# EAGLE board Bio_v4_LCD1_1button (EAGLE 6.5.0)
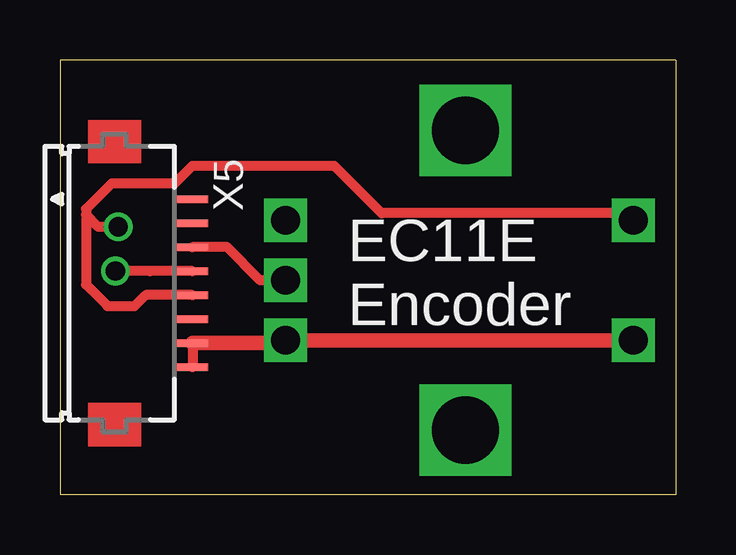
[diagram p0: board, top side]
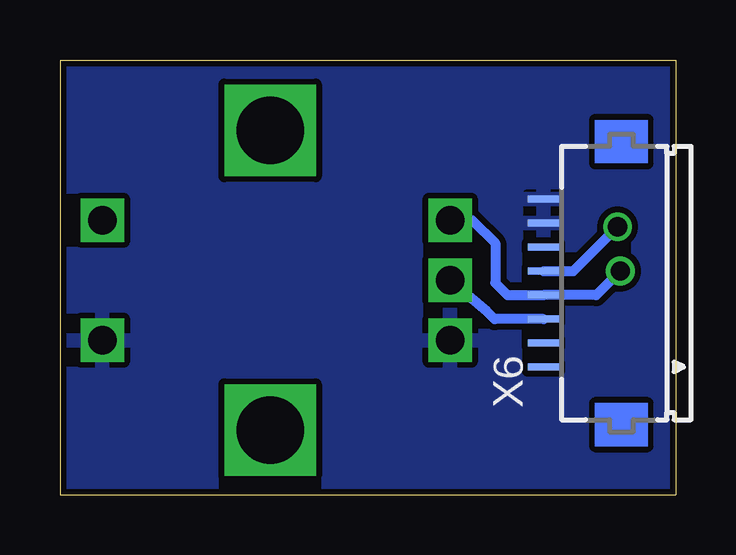
[diagram p1: board, bottom side, seen from below]

Size 25.67 x 18.14 mm. Coordinates in mm from the lower left corner, seen from the top.
Outline: 25.67,0 0,0 0,18.14 25.67,18.14 25.67,0
Copper layers (1*2*15*16): Top 0.035mm / dielectric 0.2mm / layer 2 0.0175mm / dielectric 1.1mm / layer 15 0.0175mm / dielectric 0.2mm / Bottom 0.035mm
Design rules "SeeedStudio_DRU_no_angle_20130527": minimum track width 6mil, minimum drill 12mil, track to track 6mil, track to pad 6mil, pad to pad 6mil, via to via 6mil, smd to smd 0mil, copper to edge 10mil, drill to drill 10mil, minimum pad ring 6mil, minimum via ring 6mil, stop-mask expansion 2mil, vias tented up to drill 25mil, thermal gap 10mil
Net classes: 0 default: width 0.203 mm, clearance 0.25 mm; 1 power: width 0.203 mm, drill 0.305 mm, clearance 0.25 mm; 2 VIN: width 0.457 mm, clearance 0.25 mm; 3 fine: width 0.254 mm, clearance 0.25 mm; 4 aref: width 0.356 mm, clearance 0.25 mm

## Footprints (pad centres in the part's own frame; a part is rotated, then mirrored left to right if it is on the bottom)
EC11E = drill 1.2 square: A -2.5,0; B 0,0; C 2.5,0; D -2.5,14.5; E 2.5,14.5 | drill 2.8 square: P$1 6.25,7.5; P$2 -6.25,7.5
FH12-08S-1SH = smd 0.3 x 1.3: 1 -3.5,3.25; 2 -2.5,3.25; 3 -1.5,3.25; 4 -0.5,3.25; 5 0.5,3.25; 6 1.5,3.25; 7 2.5,3.25; 8 3.5,3.25

## Placement (x,y rotation side)
U$1  EC11E  [EC11E]  9.41,8.95 270 top
X5  FH12-08S-1SH  [FH12-08S-1SH]  2.28,8.83 270 top
X6  FH12-08S-1SH  [FH12-08S-1SH]  2.27,8.84 90 bottom

## Library data of the parts
U$1 = lpatiny
X5 X6 = con-hirose; OC_FARNELL: unknown; OC_NEWARK: unknown

## Nets
D7*: U$1.D X5.5 X6.5
GND [power]: U$1.C U$1.E X5.7 X5.8 X6.7 X6.8
RX: U$1.B X5.3 X6.3
TX: U$1.A X5.4 X6.4

## Tracks (layer width: path | path; a pad name or v marks a point on that pad's centre or on a via)
D7*  (via drill 0.8)
  Top 0.406: U$1.D 23.61,11.75 13.41,11.75 11.44,13.72 5.52,13.72 4.79,13 2.16,13 1.09,11.93 1.09,11.69 | 1.09,11.69 1.09,8.77 1.99,7.87 3.11,7.87 3.57,8.33 X5.5 | v2.43,11.18 1.6,11.18 1.09,11.69
  Bottom 0.406: X6.5 4.27,9.34 v2.43,11.18
GND
  Top 0.406: X5.7 X5.8
  Top 0.61: X5.7 9.29,6.33 U$1.C U$1.E
  pour Bottom: 0.02,18.13 25.67,18.13 25.67,-0.45 -0.15,-0.45 -0.15,17.88
RX
  Top 0.406: U$1.B 8.35,8.95 6.97,10.33 X5.3
  Bottom 0.406: X6.3 7.55,7.34 7.87,7.66 U$1.B
TX  (via drill 0.8)
  Top 0.406: X5.4 3.75,9.33 3.75,9.34 v2.31,9.34
  Bottom 0.406: U$1.A 8.48,11.45 7.53,10.5 7.53,8.85 7.01,8.34 X6.4 3.31,8.34 v2.31,9.34

## Text on the board
tNames: EC11E / Encoder
tValues: Screen / v0.1
203bmp: C:/Users/G/Pictures/logo_epfl.bmp